# Altium PCB Quad.PcbDoc
Units mm, origin at the board's own origin, x right, y up, seen from the top; angles counter-clockwise.
Board outline 33 x 33 mm, 4 copper layers (Top Layer, Layer 2, Layer 3, Bottom Layer), stack 0.603 mm thick; 61 components, 56 nets, 316 pads, 0 vias.
Unrouted connection lines stored in the file: 175.
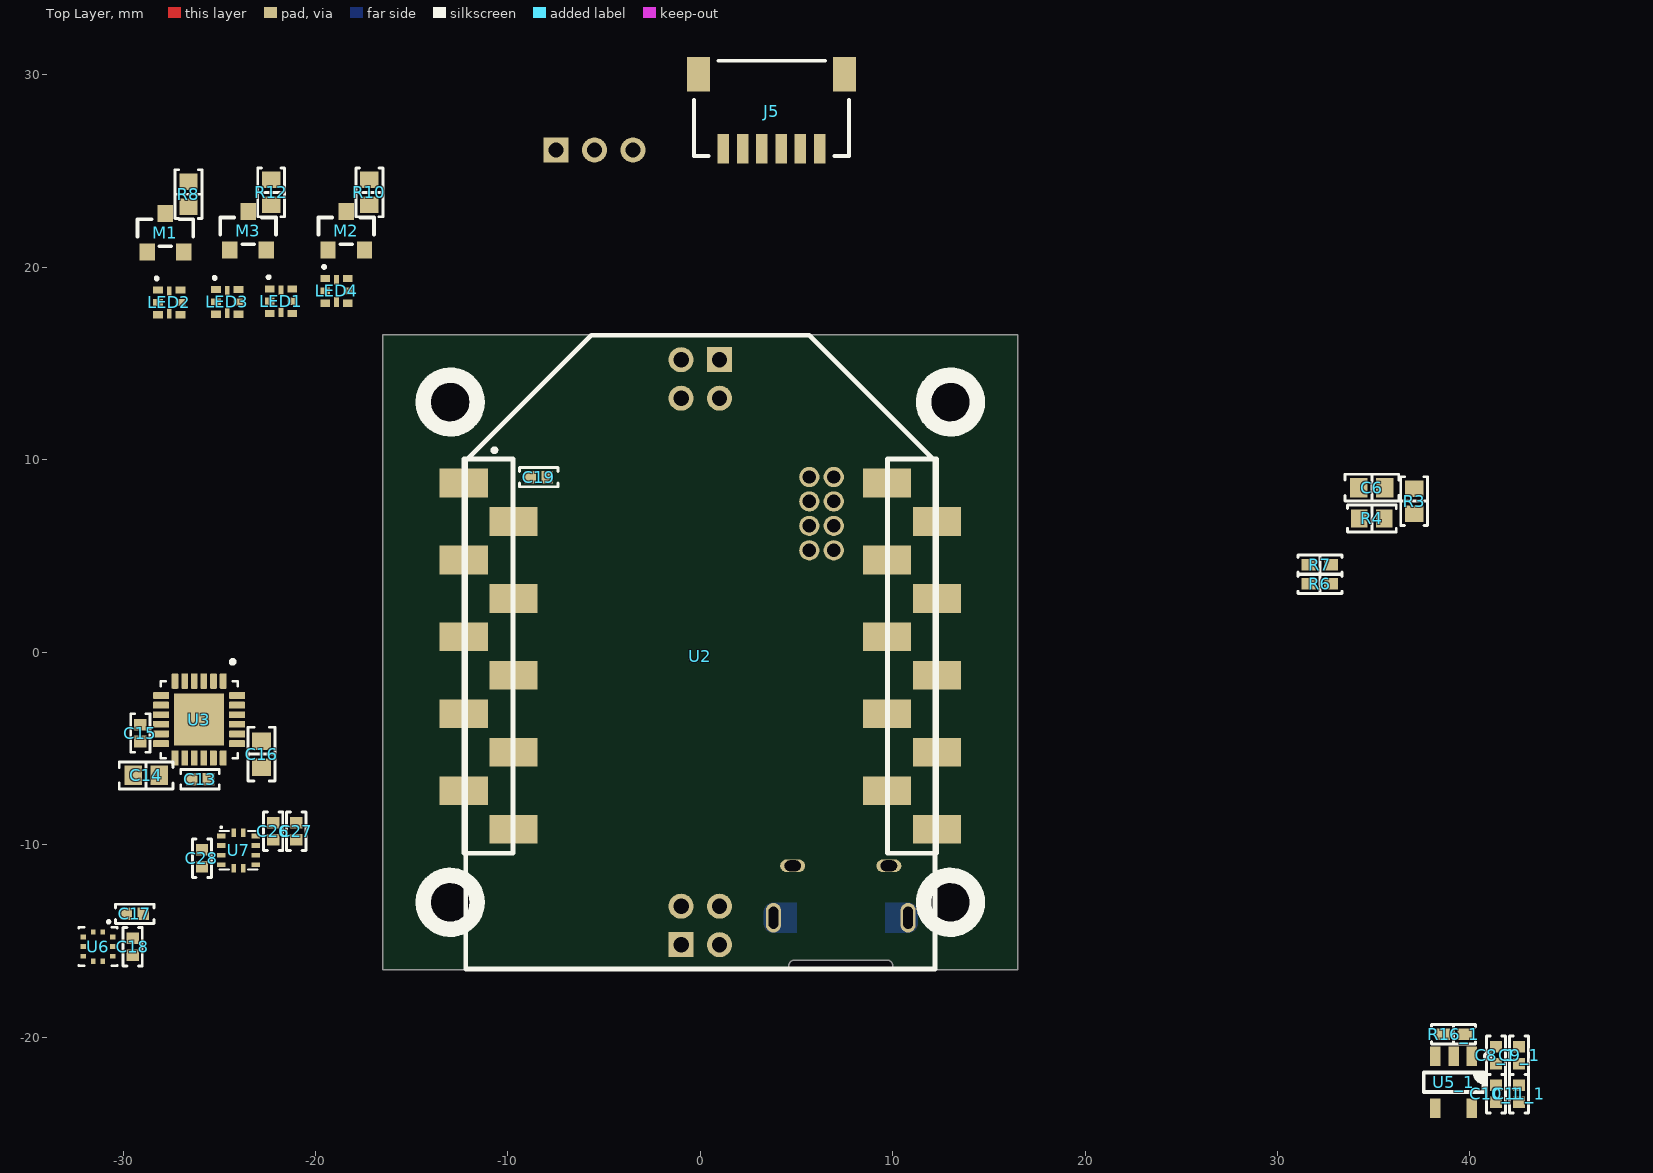
[diagram p0: Top Layer view]
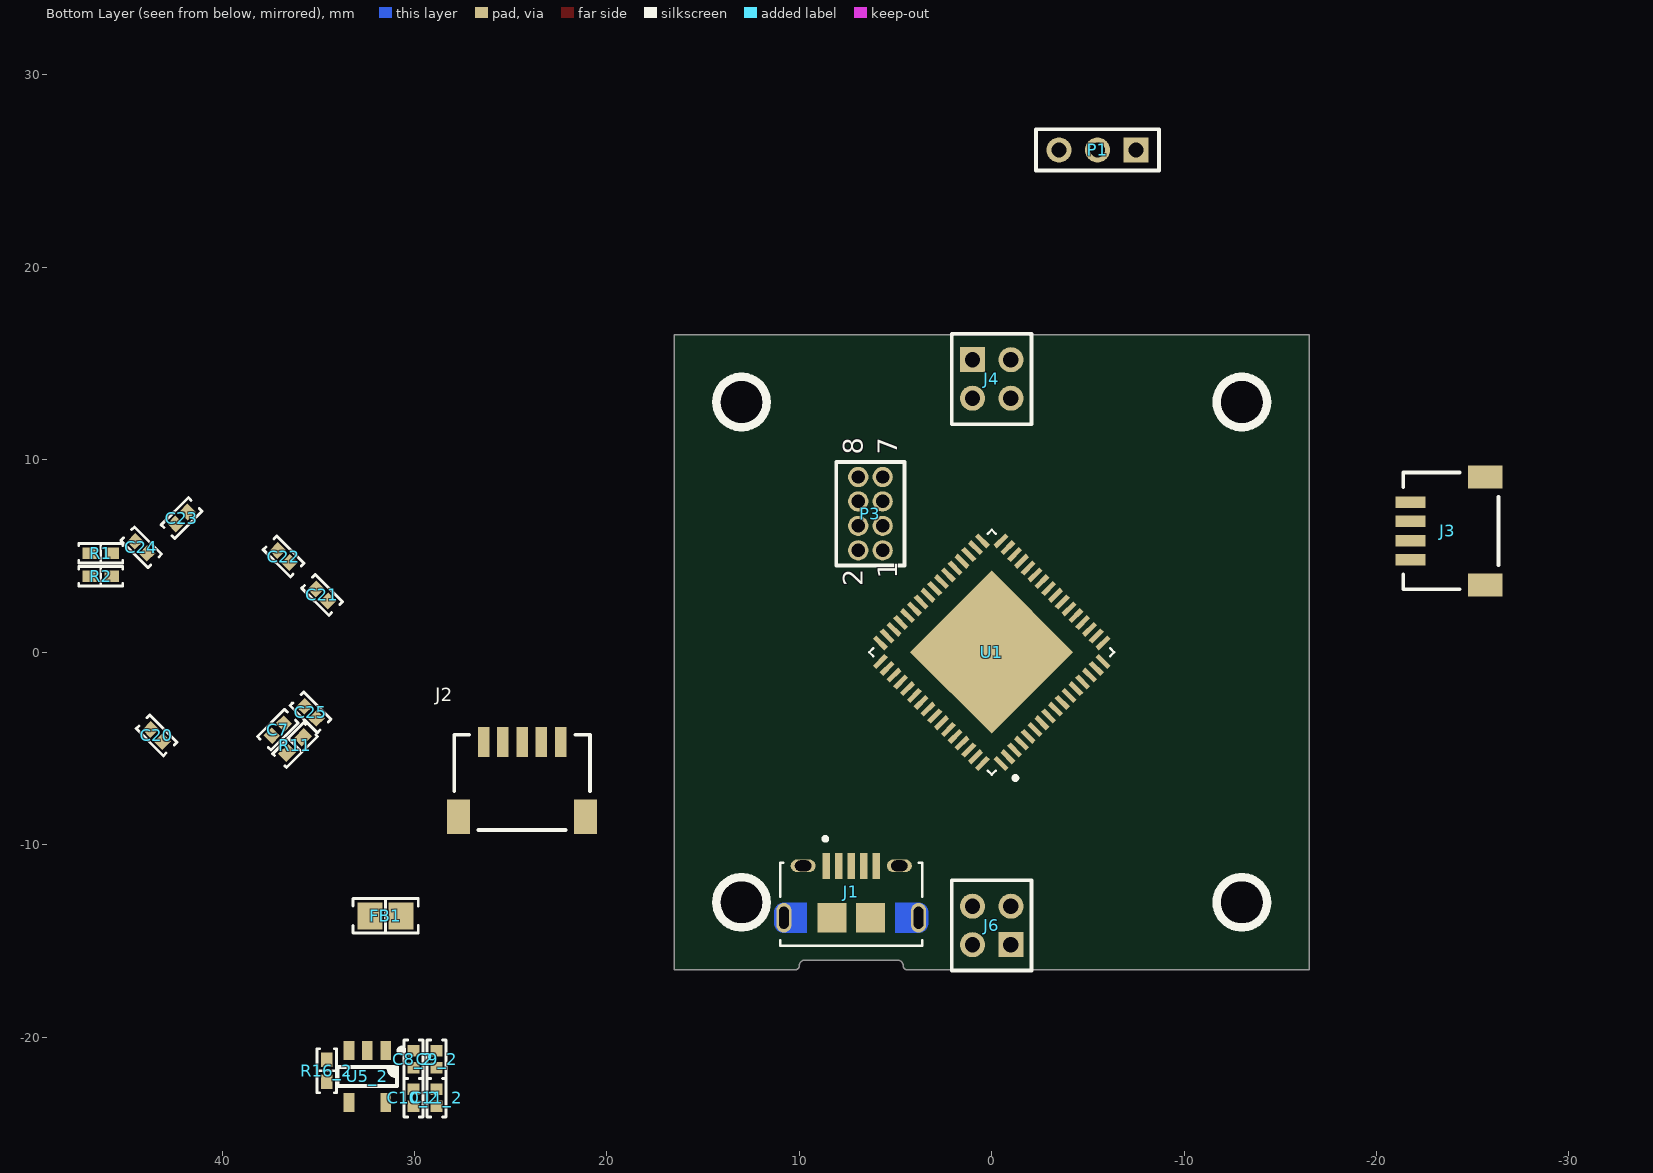
[diagram p1: Bottom Layer view, seen from below]

## Layer stack, top to bottom
Top Solder: solder mask 0.0102, Solder Resist, Dk 3.5
Top Layer: signal copper 0.0356
Dielectric 2: prepreg 0.0711, PP-006, Dk 4.1
Layer 2: signal copper 0.035
Dielectric 1: dielectric 0.32, FR-4, Dk 4.8
Layer 3: signal copper 0.035
Dielectric 3: prepreg 0.0711, PP-006, Dk 4.1
Bottom Layer: signal copper 0.0356
Bottom Solder: solder mask 0.0102, Solder Resist, Dk 3.5

## Board outline
-16.5,-16.5 -16.5,16.5 16.5,16.5 16.5,-16.5 10.2,-16.5 cw(c10.2,-16.3) 10,-16.3 ccw(c9.7,-16.3) 9.7,-16 4.9,-16 ccw(c4.9,-16.3) 4.6,-16.3 cw(c4.4,-16.3) 4.4,-16.5

## Design rules (kind name [scope] priority, off if disabled: settings)
BoardOutlineClearance [All] p1: gap=0.512 ignorepadtopadclearanceinfootprint=FALSE
Clearance "PolyGon Pour Clearance" [InPolygon] p1: gap=0.2 ignorepadtopadclearanceinfootprint=FALSE
Clearance [All] p2: gap=0.2 ignorepadtopadclearanceinfootprint=TRUE except(0: Arc-Hole Track-Hole SMDPad-Hole THPad-Hole Via-Hole Fill-Hole Poly-Hole Region-Hole Text-Hole)
HoleSize [All] p1: absolutevalues=TRUE maxlimit=6.3 minlimit=0.02 maxpercent=80.000 minpercent=20.000
PolygonConnect PolygonRelief [IsPolygon and not (IsNamedPolygon('PolygonDirect'))] p1: thpad.connectstyle=Relief thpad.reliefconductorwidth=0.254 thpad.reliefentries=4 thpad.polygonreliefangle="90 Angle" thpad.airgapwidth=0.254 smdpad.connectstyle=Relief smdpad.reliefconductorwidth=0.254 smdpad.reliefentries=4 smdpad.polygonreliefangle="90 Angle" smdpad.airgapwidth=0.254 via.connectstyle=Direct via.reliefconductorwidth=0.254 via.reliefentries=4 via.polygonreliefangle="90 Angle" via.airgapwidth=0.254
PolygonConnect [All] p2: connectstyle=Direct reliefconductorwidth=0.254 reliefentries=4 polygonreliefangle="90 Angle" airgapwidth=0.254
RoutingVias [All] p1: holewidth=0.3 width=0.55 viastyle="Through Hole" minholewidth=0.2 minwidth=0.4 maxholewidth=0.7 maxwidth=1.27
SolderMaskExpansion [All] p1: expansion=0.102 istentingtop=FALSE
Width [All] p1: maxlimit=0.712 minlimit=0.127 preferedwidth=0.254
29 further rules are at their usual default settings.

## Classes and differential pairs
component class U_PIC32MZ: C6 C7 C20 C21 C22 C23 C24 C25 J1 J2 J4 J6 P3 R1 R2 R3 R4 R6 R7 R11 U1
component class U_3V3_LDO2: C8_2 C9_2 C10_2 C11_2 R16_2 U5_2
component class U_3V3_LDO1: C8_1 C9_1 C10_1 C11_1 R16_1 U5_1
channel class 3V3_LDO: U_3V3_LDO1 U_3V3_LDO2

## Components (designator, comment, footprint, x,y, rotation, side; value= is the part's Value field where it differs from the comment)
C6 "0.01µF" "CAP 0603_1608" 34.9,8.55 r180 top
C7 "0.1 µF" "CAP 0402_1005" 37.1,-4.027 r135 bottom
C8_1 "1 µF" "CAP 0402_1005" 41.35,-20.95 r90 top (schematic designator C8)
C8_2 "1 µF" "CAP 0402_1005" 30.05,-21.15 r90 bottom (schematic designator C8)
C9_1 "0.1 µF" "CAP 0402_1005" 42.55,-20.95 r90 top (schematic designator C9)
C9_2 "0.1 µF" "CAP 0402_1005" 28.85,-21.15 r90 bottom (schematic designator C9)
C10_1 "0.1 µF" "CAP 0402_1005" 41.35,-22.95 r270 top (schematic designator C10)
C10_2 "0.1 µF" "CAP 0402_1005" 30.05,-23.15 r270 bottom (schematic designator C10)
C11_1 "1 µF" "CAP 0402_1005" 42.55,-22.95 r270 top (schematic designator C11)
C11_2 "1 µF" "CAP 0402_1005" 28.85,-23.15 r270 bottom (schematic designator C11)
C13 "0.1 µF" "CAP 0402_1005" -26,-6.6 r0 top
C14 "0.01µF" "CAP 0603_1608" -28.8,-6.4 r0 top
C15 "0.1 µF" "CAP 0402_1005" -29.1,-4.2 r270 top
C16 "2200pF" "CAP 0603_1608" -22.8,-5.3 r270 top
C17 "0.1 µF" "CAP 0402_1005" -29.4,-13.6 r180 top
C18 "0.1 µF" "CAP 0402_1005" -29.5,-15.3 r90 top
C19 "0.1 µF" "CAP 0402_1005" -8.4,9.1 r180 top
C20 "0.1 µF" "CAP 0402_1005" 43.4,-4.327 r225 bottom
C21 "0.1 µF" "CAP 0402_1005" 34.8,2.973 r225 bottom
C22 "0.1 µF" "CAP 0402_1005" 36.8,4.973 r45 bottom
C23 "0.1 µF" "CAP 0402_1005" 42.1,6.973 r135 bottom
C24 "0.1 µF" "CAP 0402_1005" 44.2,5.45 r225 bottom
C25 "0.1 µF" "CAP 0402_1005" 35.4,-3.127 r225 bottom
C26 "1 µF" "CAP 0402_1005" -22.2,-9.3 r270 top
C27 "0.1 µF" "CAP 0402_1005" -21,-9.3 r270 top
C28 "0.1 µF" "CAP 0402_1005" -25.9,-10.7 r90 top
FB1 "=Value" "FER 0805_2012" 31.5,-13.7 r0 bottom
J1 "Mirco USB port" AMPHENOL_10118194-0001LF 7.3,-13.8 r180 bottom
J2 "SM05B-SRSS-TB(LF)(SN)" "JST SM05B-SRSS-TB" 24.4,-6.7 r0 bottom
J3 "SM04B-SRSS-TB(LF)(SN)" "JST SM04B-SRSS-TB" -23.8,6.3 r270 bottom
J4 "62000421821" 62000421821 0,14.2 r270 bottom
J5 "SM06B-SRSS-TB(LF)(SN)" "JST SM06B-SRSS-TB" 3.7,28.2 r0 top
J6 "62000421821" 62000421821 0,-14.2 r90 bottom
LED1 "APA 102 2020" LED_APA-102-2020-256-8 -21.785,18.24 r0 top
LED2 "APA 102 2020" LED_APA-102-2020-256-8 -27.6,18.175 r0 top
LED3 "APA 102 2020" LED_APA-102-2020-256-8 -24.585,18.2 r0 top
LED4 "APA 102 2020" LED_APA-102-2020-256-8 -18.9,18.775 r0 top
M1 "BSS123-7-F" "DIODES SOT-23-3" -27.8,21.8 r90 top
M2 "BSS123-7-F" "DIODES SOT-23-3" -18.4,21.9 r90 top
M3 "BSS123-7-F" "DIODES SOT-23-3" -23.5,21.9 r90 top
P1 "62000311121" 62000311121 -5.5,26.1 r0 bottom
P3 "62200821121" 62200821121 6.3,7.2 r90 bottom
R1 "4.7k Ohms" "RES 0402_1005" 46.3,5.15 r0 bottom
R2 "4.7k Ohms" "RES 0402_1005" 46.3,3.95 r0 bottom
R3 "10k" "RES 0603_1608" 37.1,7.85 r90 top
R4 "2k" "RES 0603_1608" 34.9,6.95 r0 top
R6 "33 Ohms" "RES 0402_1005" 32.2,3.55 r0 top
R7 "33 Ohms" "RES 0402_1005" 32.2,4.55 r0 top
R8 "330 Ohms" "RES 0603_1608" -26.6,23.8 r90 top
R10 "330 Ohms" "RES 0603_1608" -17.2,23.9 r90 top
R11 "10k Ohms" "RES 0402_1005" 36.2,-4.827 r315 bottom
R12 "330 Ohms" "RES 0603_1608" -22.3,23.9 r90 top
R16_1 "10k Ohms" "RES 0402_1005" 39.15,-19.85 r0 top (schematic designator R16)
R16_2 "10k Ohms" "RES 0402_1005" 34.55,-21.75 r90 bottom (schematic designator R16)
U1 "PIC32MZ0512EFE064" QFN50P900X900X100-65N 0,0 r45 bottom
U2 "XBee" "XBee -SMD Header" 0,-0.2 r0 top
U3 "MPU6050" IC_MPU6050 -26.05,-3.5 r270 top
U5_1 "MIC5504" "TI SOT-23-5 DBV" 39.15,-22.35 r270 top (schematic designator U5)
U5_2 "MIC5504" "TI SOT-23-5 DBV" 32.45,-22.05 r270 bottom (schematic designator U5)
U6 "BMP390" BMP390L -31.3,-15.3 r0 top
U7 "LIS3MDL" LGA12_ST -24,-10.3 r0 top

## Footprints (in the part's own frame and the unit in brackets; to place one, negate y for a bottom-side part, rotate by r counter-clockwise, add the part's x,y. Pads: shape width x height; smd on the part's side, far side on the other; paste and mask are expansions set on the pad)
62000311121 [mm] "Pin Header, pitch 2.00 mm, THT, Vertical, single row, 3p"
  rect 1.3x1.3 hole 0.8: 1(-2,0)
  round 1.3 hole 0.8: 2(0,0) 3(2,0)
  silkscreen extent -3.2,-1.07 3.2,1.07, body extent -3,-1 3,1, height 6.05
62000421821 [mm] "Socket Header, Pitch 2.00 mm, THT, Vertical, dual row, 4p"
  rect 1.3x1.3 hole 0.8: 1(-1,-1)
  round 1.3 hole 0.8: 2(-1,1) 3(1,-1) 4(1,1)
  silkscreen extent -2.35,-2.07 2.35,2.07, body extent -2.3,-2 2.3,2, height 4.35
62200821121 [mm] "Pin Header, pitch 1.27 mm, THT, Vertical, dual row, 8p"
  round 1.05 hole 0.7: 1(-1.905,-0.635) 2(-1.905,0.635) 3(-0.635,-0.635) 4(-0.635,0.635) 5(0.635,-0.635) 6(0.635,0.635) 7(1.905,-0.635) 8(1.905,0.635)
  silkscreen extent -2.69,-1.78 2.69,1.78, body extent -2.54,-1.7 2.54,1.7, height 5.33
AMPHENOL_10118194-0001LF [mm]
  rect 0.4x1.35 smd: 1(-1.3,2.7) 2(-0.65,2.7) 3(0,2.7) 4(0.65,2.7) 5(1.3,2.7)
  oval 1.3x0.65 hole 0.55 slot 0.85 at 0 deg: S1(-2.5,2.7) S2(2.5,2.7)
  oval 0.775x1.55 hole 0.5 slot 1.15 at 90 deg: S3(-3.5,0) S6(3.5,0)
  rect 1.5x1.55 smd: S4(-1,0) S5(1,0)
  Top Layer region: 193 vertices and 0 holes, not listed, extent 2.3,-0.78 4,0.775
  Top Layer region: 193 vertices and 0 holes, not listed, extent -4,-0.775 -2.3,0.78
  silkscreen extent -3.7,-1.45 3.7,4.2, body extent -4.02,-2.7 4.03,3.1, height 2.7
BMP390L [mm]
  rect 0.25x0.275 smd: 1(0.25,0.763) 2(-0.25,0.763) 6(-0.25,-0.763) 7(0.25,-0.763)
  rect 0.275x0.25 smd: 3(-0.763,0.5) 4(-0.763,0) 5(-0.763,-0.5) 8(0.763,-0.5) 9(0.763,0) 10(0.763,0.5)
  silkscreen extent -1,-1 1,1.36, body extent -1,-1 1,1, height 0.75
"CAP 0402_1005" [mm] "Chip Capacitor, 2-Leads, Body 1.02x0.51mm, IPC Medium Density"
  rect 0.6x0.64 smd: 1(-0.44,0) 2(0.44,0)
  silkscreen extent -1,-0.5 1,0.5, body extent -0.5,-0.26 0.5,0.26, height 0.52
"CAP 0603_1608" [mm] "Chip Capacitor, 2-Leads, Body 1.60x0.80mm, IPC Medium Density"
  rect 0.9x1 smd: 1(-0.675,0) 2(0.675,0)
  silkscreen extent -1.4,-0.7 1.4,0.7, body extent -0.8,-0.41 0.8,0.41, height 0.82
"DIODES SOT-23-3" [mm] "SOT23, 3-Leads, Body 2.90x2.40mm, Pitch 0.95mm, IPC Medium Density"
  rect 0.9x0.8 smd: 1(-1,0.95) 2(-1,-0.95) 3(1,0)
  silkscreen extent -0.7,-1.45 0.7,1.45, body extent -1.41,-1.45 1.41,1.45, height 1.5
"FER 0805_2012" [mm] "Chip Ferrite, 2-Leads, Body 2.00x1.20mm, IPC Medium Density"
  rect 1.3x1.4 smd: 1(-0.8,0) 2(0.8,0)
  silkscreen extent -1.7,-0.9 1.7,0.9, body extent -1,-0.64 1,0.64, height 1.26
IC_MPU6050 [mm]
  rrect25% 0.8x0.35 smd: 1(-2,1.25) 2(-2,0.75) 3(-2,0.25) 4(-2,-0.25) 5(-2,-0.75) 6(-2,-1.25) 13(2,-1.25) 14(2,-0.75) 15(2,-0.25) 16(2,0.25) 17(2,0.75) 18(2,1.25)
  rrect25% 0.35x0.85 smd: 7(-1.25,-1.975) 8(-0.75,-1.975) 9(-0.25,-1.975) 10(0.25,-1.975) 11(0.75,-1.975) 12(1.25,-1.975) 19(1.25,1.975) 20(0.75,1.975) 21(0.25,1.975) 22(-0.25,1.975) 23(-0.75,1.975) 24(-1.25,1.975)
  rect 2.7x2.6 smd paste-2: 25(0,0)
  silkscreen extent -3.1,-2 2,2, body extent -2,-2 2,2, height 0.93
"JST SM04B-SRSS-TB" [mm] "1.0mm pitch/Disconnectable Crimp style connector"
  rect 0.6x1.55 smd: 1(-1.5,-2.032) 2(-0.5,-2.032) 3(0.5,-2.032) 4(1.5,-2.032)
  rect 1.2x1.8 smd: M(-2.8,1.843) M(2.8,1.843)
  silkscreen extent -3.03,-2.41 3.03,2.54, body extent -3,-2.38 3,2.57, height 2.95
"JST SM05B-SRSS-TB" [mm] "1.0mm pitch/Disconnectable Crimp style connector"
  rect 0.6x1.55 smd: 1(-2,-2.032) 2(-1,-2.032) 3(0,-2.032) 4(1,-2.032) 5(2,-2.032)
  rect 1.2x1.8 smd: M(-3.3,1.843) M(3.3,1.843)
  silkscreen extent -3.53,-2.41 3.53,2.54, body extent -3.5,-2.38 3.5,2.57, height 2.95
"JST SM06B-SRSS-TB" [mm] "1.0mm pitch/Disconnectable Crimp style connector"
  rect 0.6x1.55 smd: 1(-2.5,-2.032) 2(-1.5,-2.032) 3(-0.5,-2.032) 4(0.5,-2.032) 5(1.5,-2.032) 6(2.5,-2.032)
  rect 1.2x1.8 smd: M(-3.8,1.843) M(3.8,1.843)
  silkscreen extent -4.03,-2.41 4.03,2.54, body extent -4,-2.38 4,2.57, height 2.95
LED_APA-102-2020-256-8 [mm]
  rect 0.5x0.37 smd: 1(-0.585,0.64) 2(-0.585,0) 3(-0.585,-0.64) 4(0.585,-0.64) 5(0.585,0) 6(0.585,0.64)
  rect 0.25x0.5 smd: 7(0,-0.575) 8(0,0.575)
  silkscreen extent -0.7,1.2 -0.6,1.3, body extent -1,-1 1,1, height 0.9
LGA12_ST [mm]
  rect 0.45x0.25 smd: 1(-0.9,0.75) 2(-0.9,0.25) 3(-0.9,-0.25) 4(-0.9,-0.75) 7(0.9,-0.75) 8(0.9,-0.25) 9(0.9,0.25) 10(0.9,0.75)
  rect 0.25x0.45 smd: 5(-0.25,-0.925) 6(0.25,-0.925) 11(0.25,0.925) 12(-0.25,0.925)
  silkscreen extent -1,-1 1,1.25, body extent -1,-1 1,1, height 0.25
QFN50P900X900X100-65N [mm]
  rect 0.86x0.26 smd: 1(-4.435,3.75) 2(-4.435,3.25) 3(-4.435,2.75) 4(-4.435,2.25) 5(-4.435,1.75) 6(-4.435,1.25) 7(-4.435,0.75) 8(-4.435,0.25) 9(-4.435,-0.25) 10(-4.435,-0.75) 11(-4.435,-1.25) 12(-4.435,-1.75) 13(-4.435,-2.25) 14(-4.435,-2.75) 15(-4.435,-3.25) 16(-4.435,-3.75) 33(4.435,-3.75) 34(4.435,-3.25) 35(4.435,-2.75) 36(4.435,-2.25) 37(4.435,-1.75) 38(4.435,-1.25) 39(4.435,-0.75) 40(4.435,-0.25) 41(4.435,0.25) 42(4.435,0.75) 43(4.435,1.25) 44(4.435,1.75) 45(4.435,2.25) 46(4.435,2.75) 47(4.435,3.25) 48(4.435,3.75)
  rect 0.26x0.86 smd: 17(-3.75,-4.435) 18(-3.25,-4.435) 19(-2.75,-4.435) 20(-2.25,-4.435) 21(-1.75,-4.435) 22(-1.25,-4.435) 23(-0.75,-4.435) 24(-0.25,-4.435) 25(0.25,-4.435) 26(0.75,-4.435) 27(1.25,-4.435) 28(1.75,-4.435) 29(2.25,-4.435) 30(2.75,-4.435) 31(3.25,-4.435) 32(3.75,-4.435) 49(3.75,4.435) 50(3.25,4.435) 51(2.75,4.435) 52(2.25,4.435) 53(1.75,4.435) 54(1.25,4.435) 55(0.75,4.435) 56(0.25,4.435) 57(-0.25,4.435) 58(-0.75,4.435) 59(-1.25,4.435) 60(-1.75,4.435) 61(-2.25,4.435) 62(-2.75,4.435) 63(-3.25,4.435) 64(-3.75,4.435)
  rect 6x6 smd: 65(0,0)
  silkscreen extent -5.59,-4.5 4.5,4.5, body extent -4.52,-4.52 4.52,4.52, height 0.9
"RES 0402_1005" [mm] "Chip Resistor, 2-Leads, Body 1.0x0.5mm, IPC Medium Density"
  rect 0.75x0.6 smd: 1(-0.575,0) 2(0.575,0)
  silkscreen extent -1.14,-0.51 1.14,0.51, body extent -0.5,-0.25 0.5,0.25, height 0.35
"RES 0603_1608" [mm] "Chip Resistor, 2-Leads, Body 1.60x0.80mm, IPC Medium Density"
  rect 0.85x0.95 smd: 1(-0.65,0) 2(0.65,0)
  silkscreen extent -1.27,-0.7 1.27,0.7, body extent -0.8,-0.4 0.8,0.4, height 0.45
"TI SOT-23-5 DBV" [mm] "SOT23, 5-Leads, Body 2.90x2.80mm, Pitch 0.95mm, IPC Medium Density"
  rect 1x0.55 smd: 1(-1.35,0.95) 2(-1.35,0) 3(-1.35,-0.95) 4(1.35,-0.95) 5(1.35,0.95)
  silkscreen extent -1.47,-1.55 0.5,1.9, body extent -1.44,-1.42 1.39,1.48, height 1.5
"XBee -SMD Header" [mm]
  rect 2.5x1.5 smd: 1(-12.296,9) 2(-9.7,7) 3(-12.296,5) 4(-9.7,3) 5(-12.296,1) 6(-9.7,-1) 7(-12.296,-3) 8(-9.7,-5) 9(-12.296,-7) 10(-9.7,-9) 11(12.296,-9) 12(9.7,-7) 13(12.296,-5) 14(9.7,-3) 15(12.296,-1) 16(9.7,1) 17(12.296,3) 18(9.7,5) 19(12.296,7) 20(9.7,9)
  silkscreen extent -12.27,-16.27 12.28,16.67, body extent -12.88,-11 12.88,16.61, height 10.61

## Part data
C6: library part GCG188R92A104KA03D, "CAP CER 0.1UF 100V 0603 EPOXY", Capacitance=0.1µF, Device Package="0603 (1608 Metric)", Manufacturer="Murata Electronics", Operating Temperature="-55°C ~ 150°C", Ratings=AEC-Q200, Supplier Part Number 1=490-18197-1-ND, Temperature Coefficient=X8R, Tolerance=±10%, Voltage - Rated=100V, Applications=Automotive, ComponentLink1Description=Datasheet, ComponentLink1URL=https://search.murata.co.jp/Ceramy/image/img/A01X/G101/ENG/GCG188R92A104KA03-01.pdf, ComponentLink2Description="DigiKey Link", ComponentLink2URL=http://digikey.com/product-detail/en/murata-electronics/GCG188R92A104KA03D/490-18197-1-ND/9867926, Features="Epoxy Mountable", LastUpdated="21-Jan-20 12:01:59 AM", Lifecycle Status=Active, Minimum Order=1, Mounting Type="Surface Mount, MLCC, Epoxy", Package / Case="0603 (1608 Metric)", Packaging=TapeAndReel, Part Number=GCG188R92A104KA03D, Part Status=Active, PartId=9025, Price=0.07, Series=GCG, Size / Dimension="0.063\" L x 0.031\" W (1.60mm x 0.80mm)", Supplier 1=DigiKey, Thickness (Max)="0.035\" (0.90mm)"
C7 C9_1 C9_2 C10_1 C10_2 C13 C15 C17 C18 C19 C20 C21 C22 C23 C24 C25 C27 C28: library part C0402C104K4RACAUTO, "CAP CER 0.1UF 16V X7R 0402", Device Package="0402 (1005 Metric)", Manufacturer=KEMET, Operating Temperature="-55°C ~ 125°C", Ratings=AEC-Q200, Supplier Part Number 1=399-6828-1-ND, Temperature Coefficient=X7R, Tolerance=±10%, Voltage - Rated=16V, Applications="Automotive, Bypass, Decoupling", Capacitance="0.1 µF", ComponentLink1Description=Datasheet, ComponentLink1URL=https://api.kemet.com/component-edge/download/specsheet/C0402C104K4RACAUTO.pdf, ComponentLink2Description="DigiKey Link", ComponentLink2URL=https://www.digikey.com/en/products/detail/kemet/C0402C104K4RACAUTO/3314827, LastUpdated="8/14/2022 9:05:51 PM", Lifecycle Status=Active, Minimum Order=1, Mounting Type="Surface Mount, MLCC", Package / Case="0402 (1005 Metric)", Packaging=TapeAndReel, Part Number=C0402C104K4RACAUTO, Part Status=Active, PartId=3024, Price=0.01, Series="SMD Auto X7R", Size / Dimension="0.039\" L x 0.020\" W (1.00mm x 0.50mm)", Supplier 1=DigiKey, Thickness (Max)="0.022\" (0.55mm)"
C8_1 C8_2 C11_1 C11_2 C26: library part C0402C104K4RACAUTO, "CAP CER 0.1UF 16V X7R 0402", Capacitance="0.1 µF", Device Package="0402 (1005 Metric)", Manufacturer=KEMET, Operating Temperature="-55°C ~ 125°C", Ratings=AEC-Q200, Supplier Part Number 1=399-6828-1-ND, Temperature Coefficient=X7R, Tolerance=±10%, Voltage - Rated=16V, Applications="Automotive, Bypass, Decoupling", ComponentLink1Description=Datasheet, ComponentLink1URL=https://api.kemet.com/component-edge/download/specsheet/C0402C104K4RACAUTO.pdf, ComponentLink2Description="DigiKey Link", ComponentLink2URL=https://www.digikey.com/en/products/detail/kemet/C0402C104K4RACAUTO/3314827, LastUpdated="8/14/2022 9:05:51 PM", Lifecycle Status=Active, Minimum Order=1, Mounting Type="Surface Mount, MLCC", Package / Case="0402 (1005 Metric)", Packaging=TapeAndReel, Part Number=C0402C104K4RACAUTO, Part Status=Active, PartId=3024, Price=0.01, Series="SMD Auto X7R", Size / Dimension="0.039\" L x 0.020\" W (1.00mm x 0.50mm)", Supplier 1=DigiKey, Thickness (Max)="0.022\" (0.55mm)"
C14: library part C0603C103KARACAUTO, "CAP CER 0.01UF 250V X7R 0603", Device Package="0603 (1608 Metric)", Manufacturer=KEMET, Operating Temperature="-55°C ~ 125°C", Ratings=AEC-Q200, Supplier Part Number 1=399-17960-1-ND, Temperature Coefficient=X7R, Tolerance=±10%, Applications="Automotive, Bypass, Decoupling", Capacitance=0.01µF, ComponentLink1Description=Datasheet, ComponentLink1URL=https://api.kemet.com/component-edge/download/datasheet/C0603C103KARACAUTO.pdf, ComponentLink2Description="DigiKey Link", ComponentLink2URL=http://digikey.com/product-detail/en/kemet/C0603C103KARACAUTO/399-17960-1-ND/9084030, LastUpdated="13-Aug-20 10:21:06 AM", Lifecycle Status=Active, Minimum Order=1, Mounting Type="Surface Mount, MLCC", Package / Case="0603 (1608 Metric)", Packaging=TapeAndReel, Part Number=C0603C103KARACAUTO, Part Status=Active, PartId=15195, Price=0.25, Series="SMD Auto X7R", Size / Dimension="0.063\" L x 0.031\" W (1.60mm x 0.80mm)", Supplier 1=DigiKey, Thickness (Max)="0.034\" (0.87mm)"
C16: library part CGA3E2X8R1H222M080AD, "CAP CER 2200PF 50V 0603 EPOXY", Device Package="0603 (1608 Metric)", Manufacturer="TDK Corporation", Operating Temperature="-55°C ~ 150°C", Ratings=AEC-Q200, Supplier Part Number 1=445-9890-1-ND, Temperature Coefficient=X8R, Tolerance=±20%, Applications=Automotive, Capacitance=2200pF, ComponentLink1Description=Datasheet, ComponentLink1URL=https://product.tdk.com/info/en/catalog/datasheets/mlcc_automotive_epoxy_en.pdf?ref_disty=digikey, ComponentLink2Description="DigiKey Link", ComponentLink2URL=http://digikey.com/product-detail/en/tdk-corporation/CGA3E2X8R1H222M080AD/445-9890-1-ND/3931817, Features="Epoxy Mountable", LastUpdated="13-Aug-20 10:19:25 AM", Lifecycle Status=Active, Minimum Order=1, Mounting Type="Surface Mount, MLCC, Epoxy", Package / Case="0603 (1608 Metric)", Packaging=TapeAndReel, Part Number=CGA3E2X8R1H222M080AD, Part Status=Active, PartId=17643, Price=0.05, Series=CGA, Size / Dimension="0.063\" L x 0.031\" W (1.60mm x 0.80mm)", Supplier 1=DigiKey, Thickness (Max)="0.031\" (0.80mm)"
FB1: library part 2508051017Y0, "FERRITE BEAD 0805 1LN", Current Rating (Max)=300mA, DC Resistance (DCR) (Max)=200mOhm, Device Package="0805 (2012 Metric)", Manufacturer="Fair-Rite Products Corp.", Operating Temperature="-55°C ~ 125°C", Supplier Part Number 1=1934-1435-1-ND, ComponentLink1Description=Datasheet, ComponentLink1URL=http://www.fair-rite.com/wp-content/themes/fair-rite/print_product.php?pid=19091, ComponentLink2Description="DigiKey Link", ComponentLink2URL=http://digikey.com/product-detail/en/fair-rite-products-corp/2508051017Y0/1934-1435-1-ND/8594382, Filter Type="Signal Line", Height (Max)="0.043\" (1.10mm)", LastUpdated="9/2/2020 1:18:22 AM", Lifecycle Status=Active, Minimum Order=1, Mounting Type="Surface Mount", Number of Lines=1, Package / Case="0805 (2012 Metric)", Packaging=TapeAndReel, Part Number=2508051017Y0, Part Status=Active, PartId=1308, Price=0.02, Series=-, Size / Dimension="0.079\" L x 0.049\" W (2.00mm x 1.25mm)", Supplier 1=DigiKey
J1: library part 10118194-0001LF, "USB - micro B USB 2.0 Receptacle Connector 5 Position Surface Mount, Right Angle; Through Hole", Package=None, Availability=Unavailable, MF="Amphenol ICC", MP=10118194-0001LF, Price=None, SnapEDA_Link=https://www.snapeda.com/parts/10118194-0001LF/Amphenol%20FCI/view-part/1413308/?ref=snap
J2: "CONN HEADER SMD R/A 5POS 1MM", Current Rating (Amps)=0.7A, Insulation Color=Natural, Manufacturer="JST Sales America Inc.", Material Flammability Rating="UL94 V-0", Operating Temperature="-25°C ~ 85°C", Supplier Part Number 1=455-1805-1-ND, Voltage Rating=50V, ComponentLink1Description=Datasheet, ComponentLink1URL=http://www.jst-mfg.com/product/pdf/eng/eSH.pdf, ComponentLink2Description="DigiKey Link", ComponentLink2URL=http://digikey.com/product-detail/en/jst-sales-america-inc/SM05B-SRSS-TB-LF-SN/455-1805-1-ND/926876, Connector Type=Header, Contact Finish - Mating=Tin, Contact Finish - Post=Tin, Contact Material="Copper Alloy", Contact Shape=Square, Contact Type="Male Pin", Fastening Type=Push-Pull, Features="Solder Retention", Insulation Height="0.114\" (2.90mm)", Insulation Material="Polyamide (PA), Nylon", LastUpdated="1/12/2020 11:42:04 PM", Lifecycle Status=Active, Minimum Order=1, Mounting Type="Surface Mount, Right Angle", Number of Positions=5, Number of Positions Loaded=All, Number of Rows=1, Packaging=TapeAndReel, Part Number=SM05B-SRSS-TB(LF)(SN), Part Status=Active, PartId=63, Pitch - Mating="0.039\" (1.00mm)", Price=0.32, Series=SR, Shrouding="Shrouded - 4 Wall", Style="Board to Cable/Wire", Supplier 1=DigiKey, Termination=Solder
J3: "CONN HEADER SMD R/A 4POS 1MM", Current Rating (Amps)=0.7A, Insulation Color=Natural, Manufacturer="JST Sales America Inc.", Material Flammability Rating="UL94 V-0", Operating Temperature="-25°C ~ 85°C", Supplier Part Number 1=455-1804-1-ND, Voltage Rating=50V, ComponentLink1Description=Datasheet, ComponentLink1URL=http://www.jst-mfg.com/product/pdf/eng/eSH.pdf, ComponentLink2Description="DigiKey Link", ComponentLink2URL=http://digikey.com/product-detail/en/jst-sales-america-inc/SM04B-SRSS-TB-LF-SN/455-1804-1-ND/926875, Connector Type=Header, Contact Finish - Mating=Tin, Contact Finish - Post=Tin, Contact Material="Copper Alloy", Contact Shape=Square, Contact Type="Male Pin", Fastening Type=Push-Pull, Features="Solder Retention", Insulation Height="0.114\" (2.90mm)", Insulation Material="Polyamide (PA), Nylon", LastUpdated="1/12/2020 11:41:52 PM", Lifecycle Status=Active, Minimum Order=1, Mounting Type="Surface Mount, Right Angle", Number of Positions=4, Number of Positions Loaded=All, Number of Rows=1, Packaging=TapeAndReel, Part Number=SM04B-SRSS-TB(LF)(SN), Part Status=Active, PartId=62, Pitch - Mating="0.039\" (1.00mm)", Price=0.26, Series=SR, Shrouding="Shrouded - 4 Wall", Style="Board to Cable/Wire", Supplier 1=DigiKey, Termination=Solder
J4 J6: "WR-PHD Socket Header, THT, pitch 2mm, Dual Row, Vertical, 4p", Contact Resistance=20mOhm, Manufacturer="Wurth Elektronik", Operating Temperature="-40 to +105degC", Rated Current=2A, Withstanding Voltage=500VAC, Working Voltage=250VAC, ComponentLink1Description=Manufacturer, ComponentLink1URL=http://www.we-online.de, ComponentLink2Description=Datasheet, ComponentLink2URL=https://www.we-online.com/catalog/datasheet/62000421821.pdf, Gender="Socket Header", Manufacturer Part Number=62000421821, Mounting Technology=THT, Orientation=Vertical, Packaging=Tube, Pin Number=4, Pitch=2mm, Published Date="May 2020", Row Number=Dual
J5: "CONN HEADER SMD R/A 6POS 1MM", Current Rating (Amps)=0.7A, Insulation Color=Natural, Manufacturer="JST Sales America Inc.", Material Flammability Rating="UL94 V-0", Operating Temperature="-25°C ~ 85°C", Supplier Part Number 1=455-1806-1-ND, Voltage Rating=50V, ComponentLink1Description=Datasheet, ComponentLink1URL=http://www.jst-mfg.com/product/pdf/eng/eSH.pdf, ComponentLink2Description="DigiKey Link", ComponentLink2URL=http://digikey.com/product-detail/en/jst-sales-america-inc/SM06B-SRSS-TB-LF-SN/455-1806-1-ND/926877, Connector Type=Header, Contact Finish - Mating=Tin, Contact Finish - Post=Tin, Contact Material="Copper Alloy", Contact Shape=Square, Contact Type="Male Pin", Fastening Type=Push-Pull, Features="Solder Retention", Insulation Height="0.114\" (2.90mm)", Insulation Material="Polyamide (PA), Nylon", LastUpdated="1/12/2020 11:42:14 PM", Lifecycle Status=Active, Minimum Order=1, Mounting Type="Surface Mount, Right Angle", Number of Positions=6, Number of Positions Loaded=All, Number of Rows=1, Packaging=TapeAndReel, Part Number=SM06B-SRSS-TB(LF)(SN), Part Status=Active, PartId=64, Pitch - Mating="0.039\" (1.00mm)", Price=0.36, Series=SR, Shrouding="Shrouded - 4 Wall", Style="Board to Cable/Wire", Supplier 1=DigiKey, Termination=Solder
LED1 LED2 LED3 LED4: library part APA-102-2020-256-8, "8-pin type LED three-color RGB Dimming control", Package="SMD-8 iPixel LED Light Co.", Availability=Unavailable, MF="iPixel LED Light Co.", MP=APA-102-2020-256-8, Price=None, SnapEDA_Link=https://www.snapeda.com/parts/APA-102-2020-256-8/iPixel%20LED%20Light%20Co./view-part/698331/?ref=snap
M1 M2 M3: "MOSFET N-CH 100V 170MA SOT23-3", Current - Continuous Drain (Id) @ 25°C="170mA (Ta)", Drain to Source Voltage (Vdss)=100V, Drive Voltage (Max Rds On,  Min Rds On)=10V, Input Capacitance (Ciss) (Max) @ Vds="60pF @ 25V", Manufacturer="Diodes Incorporated", Operating Temperature="-55°C ~ 150°C (TJ)", Package / Case="TO-236-3, SC-59, SOT-23-3", Power Dissipation (Max)="300mW (Ta)", Supplier Device Package=SOT-23-3, Supplier Part Number 1=BSS123-FDICT-ND, ComponentLink1Description=Datasheet, ComponentLink1URL=https://www.diodes.com/assets/Datasheets/ds30366.pdf, ComponentLink2Description="DigiKey Link", ComponentLink2URL=http://digikey.com/product-detail/en/diodes-incorporated/BSS123-7-F/BSS123-FDICT-ND/717842, FET Type=N-Channel, LastUpdated="8/14/2022 10:06:21 PM", Lifecycle Status=Active, Minimum Order=1, Mounting Type="Surface Mount", Packaging=TapeAndReel, Part Number=BSS123-7-F, Part Status=Active, Price=0.05, Rds On (Max) @ Id, Vgs="6Ohm @ 170mA, 10V", Series=-, Supplier 1=DigiKey, Technology="MOSFET (Metal Oxide)", Vgs (Max)=±20V, Vgs(th) (Max) @ Id="2V @ 1mA"
P1: "WR-PHD Pin Header, THT, pitch 2mm, Single Row, Vertical, 3p", Contact Resistance=20mOhm, Manufacturer="Wurth Elektronik", Operating Temperature="-40 to +105degC", Rated Current=2A, Withstanding Voltage=500VAC, Working Voltage=200VAC, ComponentLink1Description=Manufacturer, ComponentLink1URL=http://www.we-online.de, ComponentLink2Description=Datasheet, ComponentLink2URL=https://www.we-online.com/catalog/datasheet/62000311121.pdf, Gender="Pin Header", Manufacturer Part Number=62000311121, Mounting Technology=THT, Orientation=Vertical, Packaging=Bag, Pin Number=3, Pitch=2mm, Published Date="May 2020", Row Number=Single
P3: "WR-PHD Pin Header, THT, pitch 1.27mm, Dual Row, Vertical, 8p", Contact Resistance=20mOhm, Manufacturer="Wurth Elektronik", Operating Temperature="-40 to +105degC", Rated Current=1A, Withstanding Voltage=500VAC, Working Voltage=100VAC, ComponentLink1Description=Manufacturer, ComponentLink1URL=http://www.we-online.de, ComponentLink2Description=Datasheet, ComponentLink2URL=https://www.we-online.com/catalog/datasheet/62200821121.pdf, Gender="Pin Header", Manufacturer Part Number=62200821121, Mounting Technology=THT, Orientation=Vertical, Packaging=Box, Pin Number=8, Pitch=1.27mm, Published Date="May 2020", Row Number=Dual
R1 R2 R6 R7 R11 R16_1 R16_2: library part CRCW0402330RJNEDC, "RES 330 OHM 5% 1/16W 0402", Device Package="0402 (1005 Metric)", Manufacturer="Vishay Dale", Operating Temperature="-55°C ~ 155°C", Power (Watts)="0.063W, 1/16W", Resistance="330 Ohms", Supplier Device Package=0402, Supplier Part Number 1=541-4123-1-ND, Temperature Coefficient=±200ppm/°C, Tolerance=±5%, ComponentLink1Description=Datasheet, ComponentLink1URL=http://www.vishay.com/docs/28773/crcwce3.pdf, ComponentLink2Description="DigiKey Link", ComponentLink2URL=https://www.digikey.com/en/products/detail/vishay-dale/CRCW0402330RJNEDC/7928545, Composition="Thick Film", Height - Seated (Max)="0.014\" (0.35mm)", LastUpdated="8/14/2022 9:23:31 PM", Lifecycle Status=Active, Minimum Order=1, Number of Terminations=2, Package / Case="0402 (1005 Metric)", Packaging=CutTape, Part Number=CRCW0402330RJNEDC, Part Status=Active, PartId=15989, Price=0.01, Series=CRCW-C, Size / Dimension="0.039\" L x 0.020\" W (1.00mm x 0.50mm)", Supplier 1=DigiKey
R3 R4: library part ERJ-3EKF21R5V, "RES SMD 21.5 OHM 1% 1/10W 0603", Device Package="0603 (1608 Metric)", Manufacturer="Panasonic Electronic Components", Operating Temperature="-55°C ~ 155°C", Power (Watts)="0.1W, 1/10W", Ratings=AEC-Q200, Resistance="21.5 Ohms", Supplier Device Package=0603, Supplier Part Number 1=P21.5HCT-ND, Temperature Coefficient=±100ppm/°C, Tolerance=±1%, ComponentLink1Description=Datasheet, ComponentLink1URL=https://industrial.panasonic.com/cdbs/www-data/pdf/RDA0000/AOA0000C304.pdf, ComponentLink2Description="DigiKey Link", ComponentLink2URL=http://digikey.com/product-detail/en/panasonic-electronic-components/ERJ-3EKF21R5V/P21.5HCT-ND/198246, Composition="Thick Film", Features="Automotive AEC-Q200", Height - Seated (Max)="0.022\" (0.55mm)", LastUpdated="21-Jan-20 12:16:19 AM", Lifecycle Status=Active, Minimum Order=1, Number of Terminations=2, Package / Case="0603 (1608 Metric)", Packaging=TapeAndReel, Part Number=ERJ-3EKF21R5V, Part Status=Active, PartId=24202, Price=0.01, Series=ERJ, Size / Dimension="0.063\" L x 0.031\" W (1.60mm x 0.80mm)", Supplier 1=DigiKey
R8 R10 R12: library part RNCS0603BKE10K0, "RES 10K OHM 0.1% 1/16W 0603", Device Package="0603 (1608 Metric)", Manufacturer="Stackpole Electronics Inc", Operating Temperature="-55°C ~ 155°C", Power (Watts)="0.063W, 1/16W", Ratings=AEC-Q200, Resistance="10 kOhms", Supplier Device Package=0603, Supplier Part Number 1=RNCS0603BKE10K0CT-ND, Temperature Coefficient=±25ppm/°C, Tolerance=±0.1%, ComponentLink1Description=Datasheet, ComponentLink1URL=https://www.seielect.com/catalog/sei-rncs_rnch.pdf, ComponentLink2Description="DigiKey Link", ComponentLink2URL=https://www.digikey.com/en/products/detail/stackpole-electronics-inc/RNCS0603BKE10K0/1708836, Composition="Thin Film", Features="Anti-Corrosive, Automotive AEC-Q200, Moisture Resistant", Height - Seated (Max)="0.022\" (0.55mm)", LastUpdated="8/14/2022 9:31:27 PM", Lifecycle Status=Active, Minimum Order=1, Number of Terminations=2, Package / Case="0603 (1608 Metric)", Packaging=TapeAndReel, Part Number=RNCS0603BKE10K0, Part Status=Active, PartId=4838, Price=0.08, Series=RNCS, Size / Dimension="0.061\" L x 0.031\" W (1.55mm x 0.80mm)", Supplier 1=DigiKey
U1: library part PIC32MZ0512EFE064-I/PT, "32-bit Microcontrollers - MCU 32-BIT MCU 512KB FL 128KB RAM, No Crypto", Package="TQFP-64 Microchip", Availability=Unavailable, MF=Microchip, MP=PIC32MZ2048EFG064T-I/PT, Price=None, SnapEDA_Link=https://www.snapeda.com/parts/PIC32MZ2048EFG064T-I/PT/Microchip/view-part/565997/?ref=snap
U2: library part "XBee SMD Header", "802.15.4 Transceiver Module 2.4GHz Antenna Not Included, U.FL Through Hole"
U5_1 U5_2: library part MIC5504-3.3YM5, "3.3V LDO"
U6: "Altimeter"
U7: "Magnetometer"

## Free pads (board coordinates)
  round 1.524 hole 2.2: 1(-13,-13) 1(-13,13) 1(13,-13) 1(13,13)

## Nets (pads, with @x,y where several pads share a name; then routed paths per layer and width w, separated by ;. In a path a pad name is that pad's centre, name@x,y a point inside that pad or via, vN(x,y) a via of type N, cw(c..) or ccw(c..) an arc to the next point about the centre after c; other vN are vias at no path point)
3V3: C10_2.2 C11_2.2 C19.2 FB1.1 U2.1 U5_2.5
3V3_IMU: C10_1.2 C11_1.2 C13.1 C14.2 C17.2 C18.2 C26.1 C27.1 U3.8 U3.13 U5_1.5 U6.1 U6.6 U6.10 U7.5 U7.6 U7.10
5V: C8_1.2 C8_2.2 C9_1.2 C9_2.2 LED1.1 LED1.8 LED2.1 LED2.8 LED3.1 LED3.8 LED4.1 LED4.8 P1.2 R16_1.2 R16_2.2 U5_1.1 U5_2.1
BMP_INT: U6.7
CON_LED_G: R10.2
CON_LED_R: R8.2 R12.2
ESC0: J4.1 P3.8 U1.21
ESC1: J4.2 P3.7 U1.22
ESC2: P3.3 U1.17
ESC3: J6.1 P3.5 U1.18
ESC4: J6.2
ESC_TO_MCU_U6: P3.1 U1.14
GATE_LED_B: M3.1
GATE_LED_G: M2.1
GATE_LED_R: M1.1
GND: C6.2 C7.1 C8_1.1 C8_2.1 C9_1.1 C9_2.1 C10_1.1 C10_2.1 C11_1.1 C11_2.1 C13.2 C14.1 C15.2 C16.2 C17.1 C18.1 C19.1 C20.1 C21.1 C22.1 C23.1 C24.1 C25.2 C26.2 C27.2 C28.2 J1.5 J1.S1 J1.S2 J1.S3 J1.S4 J1.S5 J1.S6 J2.3 LED1.6 LED1.7 LED2.6 LED2.7 LED3.6 LED3.7 LED4.6 LED4.7 M1.2 M2.2 M3.2 P1.1 P3.4 P3.6 R4.1 U1.7 U1.20 U1.25 U1.35 U1.40 U1.55 U1.59 U1.65 U2.10 U3.1 U3.9 U3.11 U3.18 U3.25 U5_1.2 U5_2.2 U6.3 U6.5 U6.8 U6.9 U7.2 U7.3 U7.9 U7.12
LED_CI: LED1.5
LED_DI: LED1.4
LIS3_DRDY: U7.8
LIS3_INT: U7.7
MCLR: C25.1 J2.1 R11.1 U1.9
MCU_TO_ESC_U6: P3.2 U1.10
MCU_TO_XBEE_U4: R6.2 U1.30
MCU_VDD: C7.2 C20.2 C21.2 C22.2 C23.2 C24.2 FB1.2 J2.2 R1.2 R2.2 R11.2 U1.8 U1.19 U1.26 U1.34 U1.39 U1.54 U1.60
MPU_INT: U3.12
NetC15_1: C15.1 U3.10
NetC16_1: C16.1 U3.20
NetC28_1: C28.1 U7.4
NetLED1_2: LED1.2 LED2.4
NetLED1_3: LED1.3 LED2.5
NetLED2_2: LED2.2 LED3.4
NetLED2_3: LED2.3 LED3.5
NetLED3_2: LED3.2 LED4.4
NetLED3_3: LED3.3 LED4.5
NetM1_3: M1.3 R8.1
NetM2_3: M2.3 R10.1
NetM3_3: M3.3 R12.1
NetR16_1_1: R16_1.1 U5_1.3
NetR16_2_1: R16_2.1 U5_2.3
PGC: J2.5 U1.15
PGD: J2.4 U1.16
RPM0: J4.3
RPM1: J4.4
RPM3: J6.3
RPM4: J6.4
SCL: R2.1 U1.42 U3.23 U6.4 U7.1
SDA: R1.1 U1.41 U3.24 U6.2 U7.11
USB_D+: J1.3 U1.37
USB_D-: J1.2 U1.36
USB_ID: J1.4 U1.38
VBAT: P1.3 R3.2
VBAT_ADC: C6.1 R3.1 R4.2 U1.28
VBUS: J1.1 U1.33
XBEE_DIN: R6.1 U2.3
XBEE_DOUT: R7.1 U2.2
XBEE_TO_MCU_U4: R7.2 U1.29
pads on no net: J2.M J3.1 J3.2 J3.3 J3.4 J3.M J5.1 J5.2 J5.3 J5.4 J5.5 J5.6 J5.M LED4.2 LED4.3 U1.1 U1.2 U1.3 U1.4 U1.5 U1.6 U1.11 U1.12 U1.13 U1.23 U1.24 U1.27 U1.31 U1.32 U1.43 U1.44 U1.45 U1.46 U1.47 U1.48 U1.49 U1.50 U1.51 U1.52 U1.53 U1.56 U1.57 U1.58 U1.61 U1.62 U1.63 U1.64 U2.4 U2.5 U2.6 U2.7 U2.8 U2.9 U2.11 U2.12 U2.13 U2.14 U2.15 U2.16 U2.17 U2.18 U2.19 U2.20 U3.2 U3.3 U3.4 U3.5 U3.6 U3.7 U3.14 U3.15 U3.16 U3.17 U3.19 U3.21 U3.22 U5_1.4 U5_2.4

## Silkscreen, mask and mechanical layers (free items; w line width, h text height)
Top Overlay:
  circle w0.8: c13,-13 r1.4
  circle w0.8: c-13,-13 r1.4
  circle w0.8: c13,13 r1.4
  circle w0.8: c-13,13 r1.4
Bottom Overlay:
  circle w0.44: c13,-13 r1.31
  circle w0.44: c-13,-13 r1.31
  circle w0.44: c13,13 r1.31
  circle w0.44: c-13,13 r1.31
Board:
  lines w0.254: -16.5,-16.5 4.1,-16.5 4.4,-16.5 ccw(c4.4,-16.3) 4.6,-16.3 cw(c4.9,-16.3) 4.9,-16 9.7,-16 cw(c9.7,-16.3) 10,-16.3 ccw(c10.2,-16.3) 10.2,-16.5 16.5,-16.5 16.5,16.5 -16.5,16.5 -16.5,-16.5

## Text inside footprints (layer, text, board x,y; h text height)
P3: Bottom Overlay "7" at 4.9,10.27 h1.02 r270; Bottom Overlay "8" at 6.7,10.27 h1.02 r270; Bottom Overlay "1" at 4.9,3.83 h1.02 r270; Bottom Overlay "2" at 6.7,3.43 h1.02 r270